# Altium PCB PCB1.PcbDoc
Units mm, origin at the board's own origin, x right, y up, seen from the top; angles counter-clockwise.
Board outline 28 x 26.25 mm, 2 copper layers (Top Layer, Bottom Layer); 1 components, 20 nets, 40 pads, 0 vias.
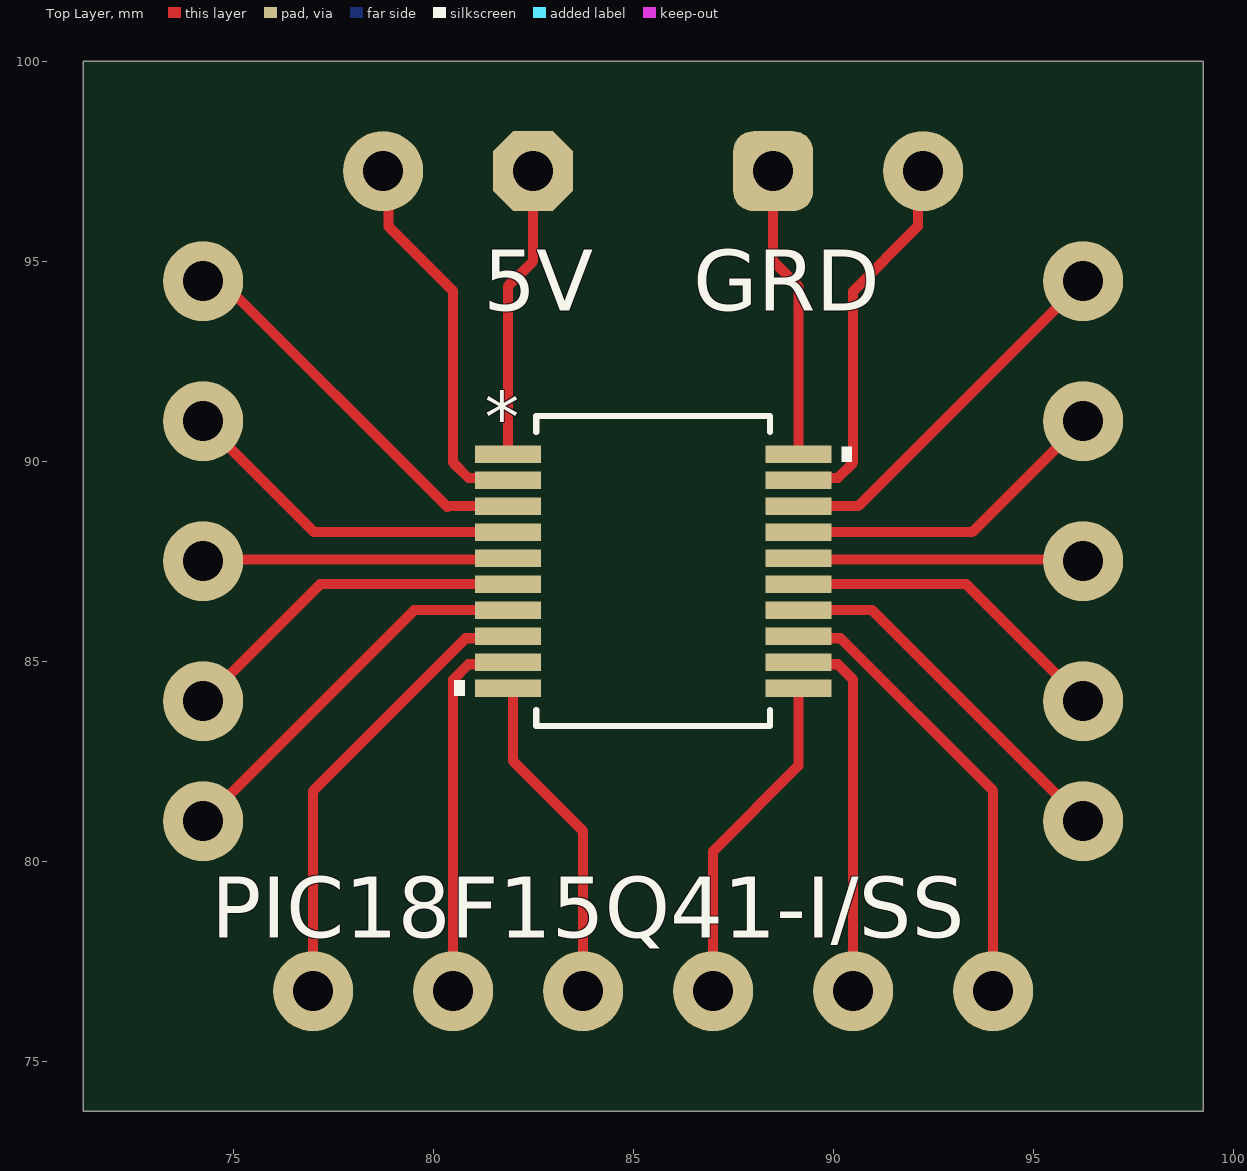
[diagram p0: Top Layer view]
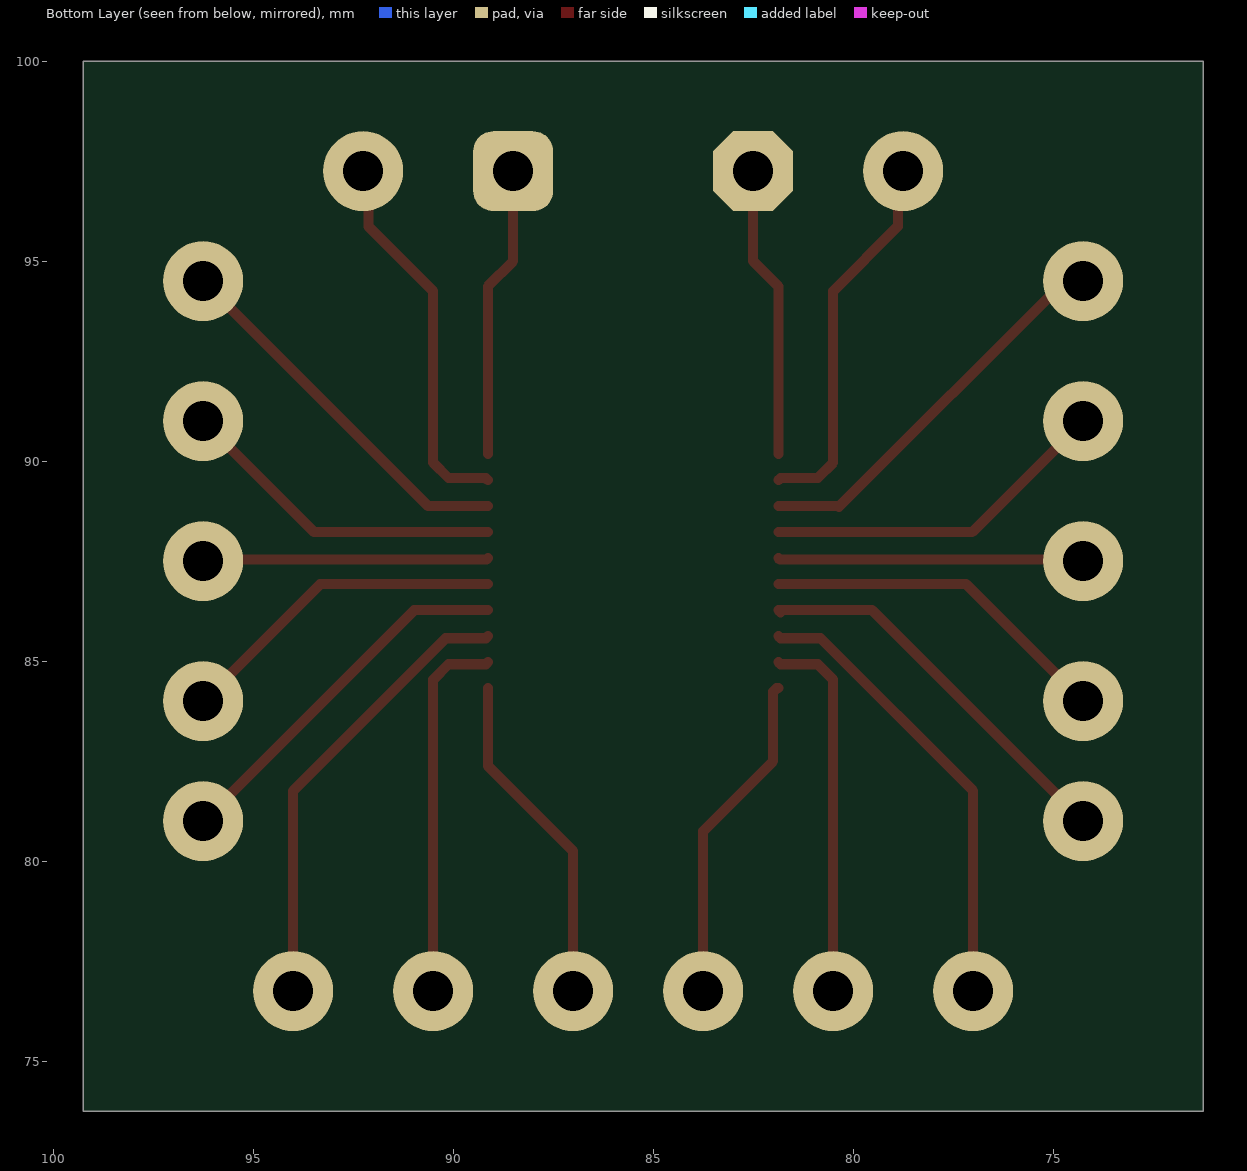
[diagram p1: Bottom Layer view, seen from below]

## Layer stack, top to bottom
Top Solder: solder mask 0.0102, Solder Resist, Dk 3.5
Top Layer: signal copper 0.0356
Dielectric 1: dielectric 0.32, FR-4, Dk 4.8
Bottom Layer: signal copper 0.0356
Bottom Solder: solder mask 0.0102, Solder Resist, Dk 3.5

## Board outline
71.25,73.75 71.25,100 99.25,100 99.25,73.75

## Design rules (kind name [scope] priority, off if disabled: settings)
Clearance [All] p1: gap=0.254 ignorepadtopadclearanceinfootprint=FALSE except(0: Arc-Hole Track-Hole SMDPad-Hole THPad-Hole Via-Hole Fill-Hole Poly-Hole Region-Hole Text-Hole)
PolygonConnect [All] p1: connectstyle=Relief reliefconductorwidth=0.254 reliefentries=4 polygonreliefangle="90 Angle" airgapwidth=0.254
RoutingVias [All] p1: holewidth=0.711 width=1.27 viastyle="Through Hole" minholewidth=0.711 minwidth=1.27 maxholewidth=0.711 maxwidth=1.27
SolderMaskExpansion [All] p1: expansion=0.102 istentingtop=FALSE
Width [All] p1: maxlimit=0.254 minlimit=0.254 preferedwidth=0.254
30 further rules are at their usual default settings.

## Components (designator, comment, footprint, x,y, rotation, side; value= is the part's Value field where it differs from the comment)
PIC18F15Q41-I/SS "PIC18F15Q41-ISS" SSOP20_SS_MCH 85.5,87.25 r0 top (schematic designator U1)

## Footprints (in the part's own frame and the unit in brackets; to place one, negate y for a bottom-side part, rotate by r counter-clockwise, add the part's x,y. Pads: shape width x height; smd on the part's side, far side on the other; paste and mask are expansions set on the pad)
SSOP20_SS_MCH [mil]
  rect 65x17 smd paste+0 mask+0: 1(-143,115.16) 2(-143,89.57) 3(-143,63.98) 4(-143,38.39) 5(-143,12.79) 6(-143,-12.8) 7(-143,-38.39) 8(-143,-63.98) 9(-143,-89.57) 10(-143,-115.16) 11(143,-115.16) 12(143,-89.57) 13(143,-63.98) 14(143,-38.39) 15(143,-12.8) 16(143,12.79) 17(143,38.39) 18(143,63.98) 19(143,89.57) 20(143,115.16)
  silkscreen extent -196,-152 196,153, body extent -161,-147 161,147, height 79

## Part data
PIC18F15Q41-I/SS: "No Description Available", Mfr_Name=Microchip, RefDes=RefDes, Type=Type

## Free pads (board coordinates)
  round 2 hole 1: 0(74.25,81) 0(96.25,94.5) 10(74.25,87.5) 10(74.25,91) 10(74.25,94.5) 10(77,76.75) 10(78.75,97.25) 10(80.5,76.75) 10(83.75,76.75) 10(87,76.75) 10(90.5,76.75) 10(92.25,97.25) 10(94,76.75) 10(96.25,81) 10(96.25,84) 10(96.25,87.5) RA0(74.25,84) RA0(96.25,91)
  oct 2x2 hole 1: 10(82.5,97.25)
  rrect50% 2x2 hole 1: 10(88.5,97.25)

## Nets (pads, with @x,y where several pads share a name; then routed paths per layer and width w, separated by ;. In a path a pad name is that pad's centre, name@x,y a point inside that pad or via, vN(x,y) a via of type N, cw(c..) or ccw(c..) an arc to the next point about the centre after c; other vN are vias at no path point)
+5: pad.10@82.5,97.25 PIC18F15Q41-I/SS.1 | length 7.8
  Top Layer w0.254: PIC18F15Q41-I/SS.1 81.868,94.368 82.5,95 82.5,97.5 pad.10@82.5,97.25
GND: pad.10@88.5,97.25 PIC18F15Q41-I/SS.20 | length 7.3
  Top Layer w0.254: pad.10@88.5,97.25 88.5,95 89.132,94.368 PIC18F15Q41-I/SS.20
RA0: pad.10@92.25,97.25 PIC18F15Q41-I/SS.19 | length 9.6
  Top Layer w0.254: PIC18F15Q41-I/SS.19 89.185,89.578 90.116,89.578 90.5,89.963 90.5,94.25 92.119,95.869 92.119,97.119 pad.10@92.25,97.25
RA1: pad.0@96.25,94.5 PIC18F15Q41-I/SS.18 | length 9.4
  Top Layer w0.254: PIC18F15Q41-I/SS.18 90.625,88.875 pad.0@96.25,94.5
RA2: pad.RA0@96.25,91 PIC18F15Q41-I/SS.17 | length 8.3
  Top Layer w0.254: PIC18F15Q41-I/SS.17 93.475,88.225 pad.RA0@96.25,91
RA3: pad.10@74.25,91 PIC18F15Q41-I/SS.4 | length 8.8
  Top Layer w0.254: pad.10@74.25,91 77.025,88.225 PIC18F15Q41-I/SS.4
RA4: pad.10@74.25,94.5 PIC18F15Q41-I/SS.3 | length 10.3
  Top Layer w0.254: pad.10@74.25,94.25 pad.10@74.471,94.029 ; pad.10@74.25,94.5 74.71,94.5 80.355,88.855 80.375,88.875 PIC18F15Q41-I/SS.3
RA5: pad.10@78.75,97.25 PIC18F15Q41-I/SS.2 | length 9.6
  Top Layer w0.254: pad.10@78.75,97.25 78.881,97.119 78.881,95.869 80.5,94.25 80.5,89.963 80.884,89.578 81.815,89.578 PIC18F15Q41-I/SS.2
RB4: pad.10@94,76.75 PIC18F15Q41-I/SS.13 | length 11.5
  Top Layer w0.254: PIC18F15Q41-I/SS.13 89.185,85.572 90.184,85.572 94,81.756 pad.10@94,76.75
RB5: pad.10@90.5,76.75 PIC18F15Q41-I/SS.12 | length 9.3
  Top Layer w0.254: PIC18F15Q41-I/SS.12 89.185,84.922 90.116,84.922 90.5,84.537 pad.10@90.5,76.75
RB6: pad.10@87,76.75 PIC18F15Q41-I/SS.11 | length 8.5
  Top Layer w0.254: pad.10@87,76.75 87,80.25 89.132,82.382 PIC18F15Q41-I/SS.11
RB7: pad.10@83.75,76.75 PIC18F15Q41-I/SS.10 | length 8.4
  Top Layer w0.254: PIC18F15Q41-I/SS.10 81.911,84.325 82,84.236 82,82.5 83.75,80.75 pad.10@83.75,76.75
RC0: pad.10@96.25,87.5 PIC18F15Q41-I/SS.16 | length 7.1
  Top Layer w0.254: PIC18F15Q41-I/SS.16 89.17,87.537 96.212,87.537 pad.10@96.25,87.5
RC1: pad.10@96.25,84 PIC18F15Q41-I/SS.15 | length 8.3
  Top Layer w0.254: PIC18F15Q41-I/SS.15 93.325,86.925 pad.10@96.25,84
RC2: pad.10@96.25,81 PIC18F15Q41-I/SS.14 | length 9.3
  Top Layer w0.254: PIC18F15Q41-I/SS.14 90.975,86.275 pad.10@96.25,81
RC3: pad.0@74.25,81 PIC18F15Q41-I/SS.7 | length 9.9
  Top Layer w0.254: pad.0@74.25,81 79.525,86.275 PIC18F15Q41-I/SS.7 PIC18F15Q41-I/SS.7@81.815,86.222
RC4: pad.RA0@74.25,84 PIC18F15Q41-I/SS.6 | length 8.8
  Top Layer w0.254: pad.RA0@74.25,84 77.175,86.925 PIC18F15Q41-I/SS.6
RC5: pad.10@74.25,87.5 PIC18F15Q41-I/SS.5 | length 7.6
  Top Layer w0.254: pad.10@74.25,87.5 74.287,87.537 81.83,87.537 PIC18F15Q41-I/SS.5
RC6: pad.10@77,76.75 PIC18F15Q41-I/SS.8 | length 11.5
  Top Layer w0.254: pad.10@77,76.75 77,81.756 80.816,85.572 81.815,85.572 PIC18F15Q41-I/SS.8
RC7: pad.10@80.5,76.75 PIC18F15Q41-I/SS.9 | length 9.3
  Top Layer w0.254: pad.10@80.5,76.75 80.5,84.537 80.884,84.922 81.815,84.922 PIC18F15Q41-I/SS.9

## Silkscreen, mask and mechanical layers (free items; w line width, h text height)
Top Overlay:
  text "5V" at 81.254,93.754 h1.52
  text "GRD" at 86.504,93.754 h1.52
Mechanical 1:
  lines w0.254: 71.25,73.75 99.25,73.75 99.25,100 98.75,100 83.75,100 71.25,100 71.25,73.75

## Text inside footprints (layer, text, board x,y; h text height)
PIC18F15Q41-I/SS: Top Overlay "*" at 81.296,90.48 h1.27; Mechanical 13 "*" at 82.769,89.65 h1.27